# EAGLE board indicator_pcb (EAGLE 9.6.2)
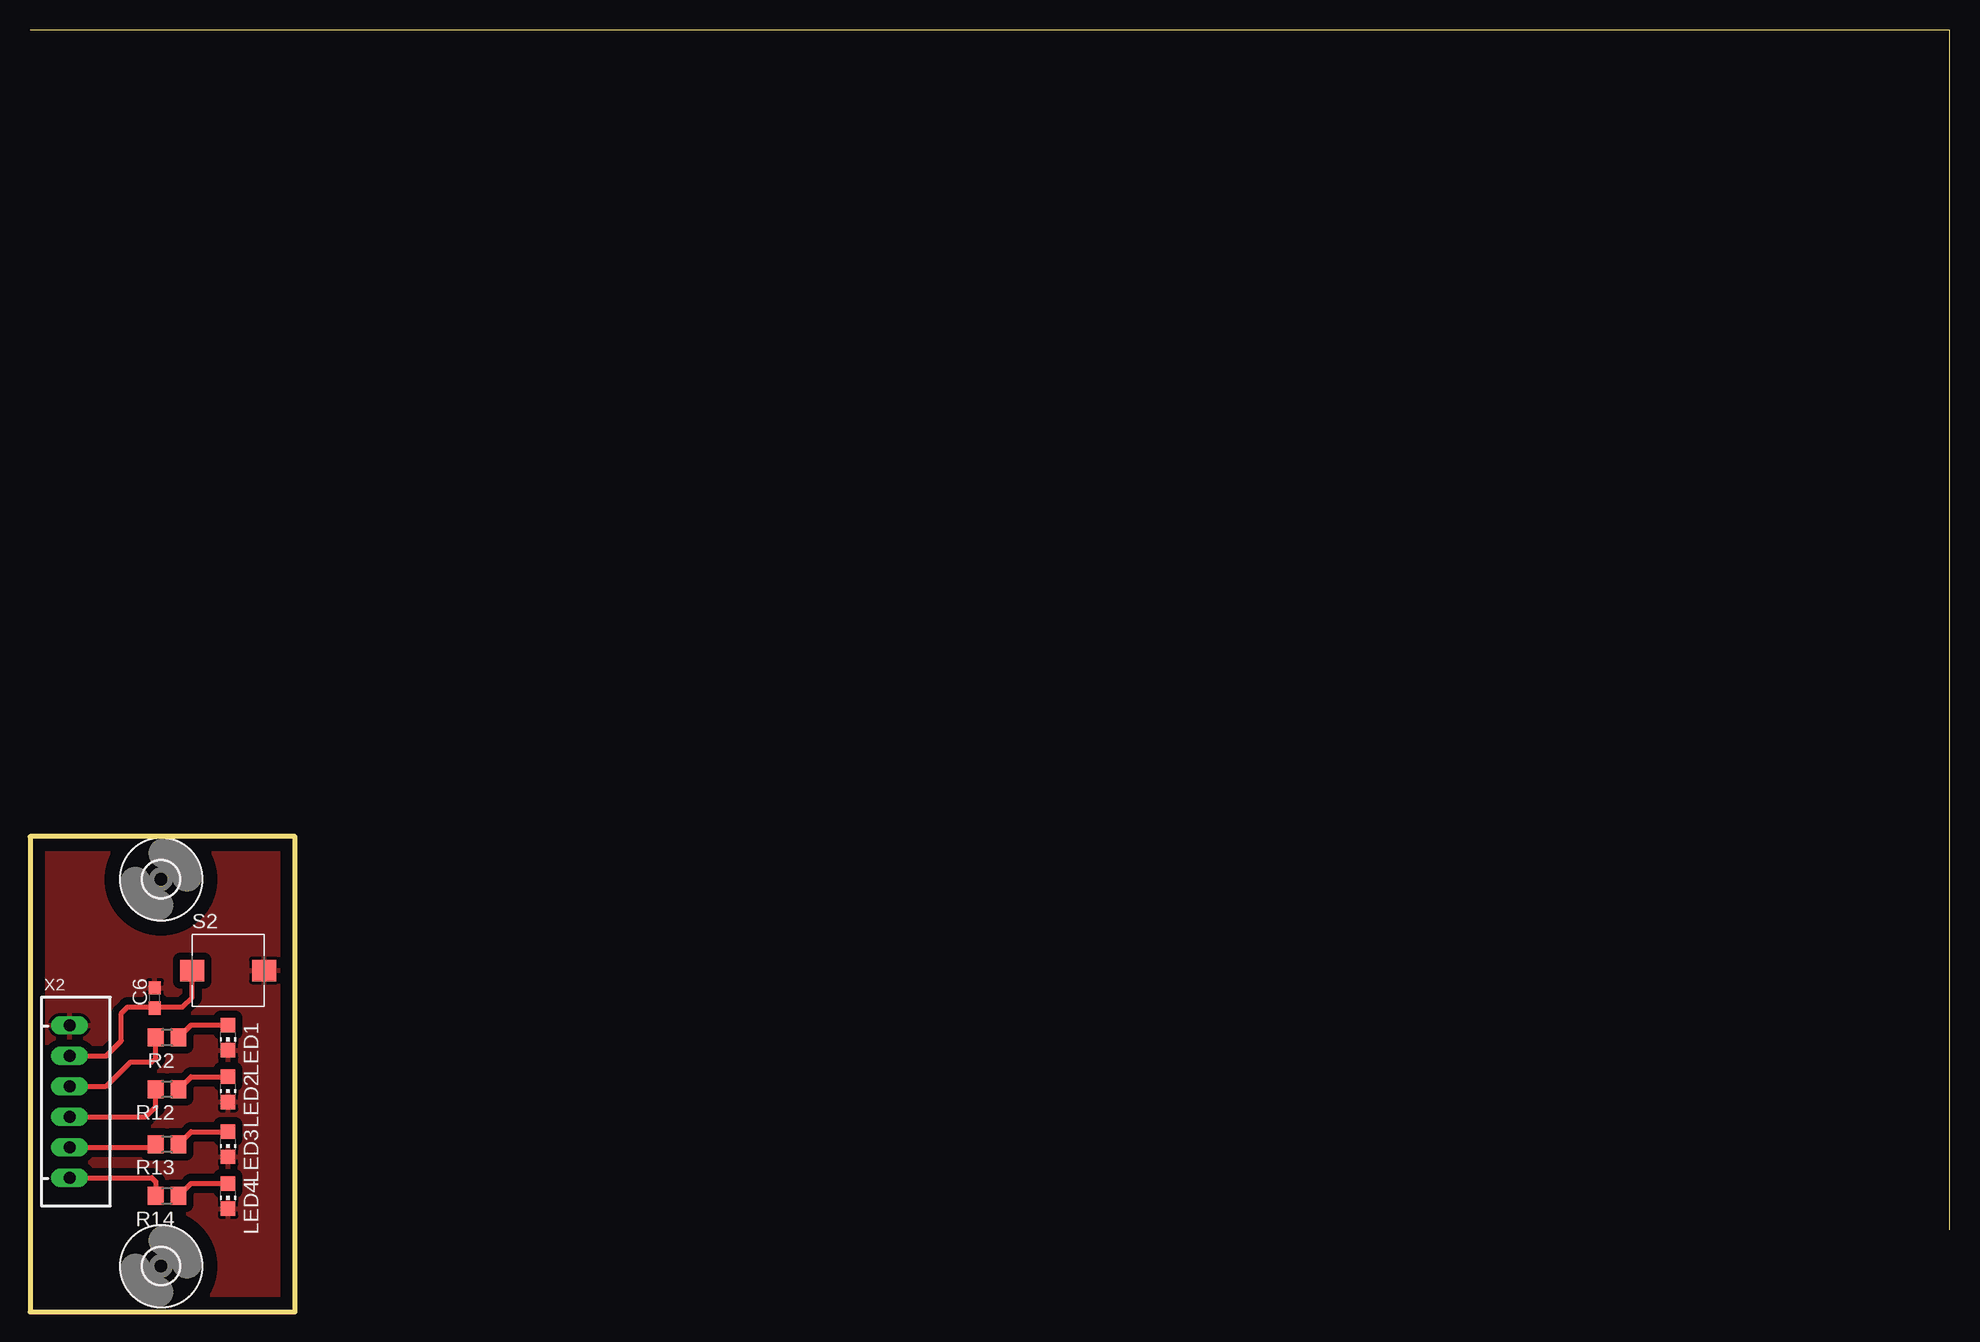
[diagram p0: board, top side]

Size 160 x 106.86 mm. Coordinates in mm from the lower left corner, seen from the top.
Outline: 160,6.86 160,106.86 0,106.86
Outline: 0,0 22.1,0 22.1,39.62 0,39.62 0,0
Copper layers (1*16): Top 0.035mm / dielectric 1.5mm / Bottom 0.035mm
Design rules "default": minimum track width 6mil, minimum drill 0.35mm, track to track 6mil, track to pad 6mil, pad to pad 6mil, via to via 6mil, smd to smd 6mil, copper to edge 40mil, drill to drill 6mil, minimum pad ring 10mil, minimum via ring 8mil, stop-mask expansion 4mil, vias tented up to drill 0mil, thermal gap 10mil

## Footprints (pad centres in the part's own frame; a part is rotated, then mirrored left to right if it is on the bottom)
C0603 = smd 1.1 x 1: 1 -0.85,0; 2 0.85,0
CHIP-LED0805 = smd 1.2 x 1.2: A 0,-1.05; C 0,1.05
R0805 = smd 1.3 x 1.5: 1 -0.95,0; 2 0.95,0
SW_TL9210AF180Q = smd 2 x 1.8: 1 -3,0; 2 3,0
3,0 = hole 3: 0,0
JST-XH-06-PACKAGE-LONG-PAD = drill 1.016 long: 1 -6.35,0; 2 -3.81,0; 3 -1.27,0; 4 1.27,0; 5 3.81,0; 6 6.35,0

## Placement (x,y rotation side)
C6  [C0603]  10.41,26.16 90 top
LED1  [CHIP-LED0805]  16.51,22.86 180 top
LED2  [CHIP-LED0805]  16.51,18.54 180 top
LED3  [CHIP-LED0805]  16.51,13.97 180 top
LED4  [CHIP-LED0805]  16.51,9.65 180 top
R2  [R0805]  11.43,22.86 180 top
R12  [R0805]  11.43,18.54 180 top
R13  [R0805]  11.43,13.97 180 top
R14  [R0805]  11.43,9.65 180 top
S2  TL9210AF180Q  [SW_TL9210AF180Q]  16.51,28.45 0 top
U$1  [3,0]  10.92,36.07 0 top
U$2  [3,0]  10.92,3.81 0 top
X2  PCB_SEC  [JST-XH-06-PACKAGE-LONG-PAD]  3.3,17.53 270 top

## Library data of the parts
C6 = rcl; SPICEPREFIX: C
LED1-LED4 = led
R2 R12-R14 = rcl; SPICEPREFIX: R
S2 = TL9210AF180Q; AVAILABILITY: In Stock; DESCRIPTION: Tactile Switch SPST-NO Top Actuated Surface Mount; MF: E-Switch; MP: TL9210AF180Q; PACKAGE: None; PRICE: None
U$1 U$2 = holes
X2 = Rembrandt Electronics - JST XH Connectors v1-0-2-2-2-2

## Nets
BUTTON: C6.1 S2.1 X2.2
GND: C6.2 LED1.C LED2.C LED3.C LED4.C S2.2 X2.1
LEDIN1: R2.2 X2.3
LEDIN2: R12.2 X2.4
LEDIN3: R13.2 X2.5
LEDIN4: R14.2 X2.6
N$1: LED1.A R2.1
N$2: LED2.A R12.1
N$3: LED3.A R13.1
N$4: LED4.A R14.1

## Tracks (layer width: path | path; a pad name or v marks a point on that pad's centre or on a via)
BUTTON
  Top 0.406: C6.1 10.5,25.4 | 10.5,25.4 12.7,25.4 13.51,26.21 S2.1 | 10.5,25.4 8.13,25.4 7.62,24.89 7.62,22.61 6.35,21.34 X2.2
GND
  pour Top (isolate 0.61): 0,39.62 0,0 22.1,0 22.1,39.62
LEDIN1
  Top 0.406: X2.3 6.35,18.8 8.38,20.83 10.16,20.83 10.48,21.15 R2.2
LEDIN2
  Top 0.406: X2.4 9.65,16.26 10.48,17.08 R12.2
LEDIN3
  Top 0.406: X2.5 10.23,13.72 R13.2
LEDIN4
  Top 0.406: X2.6 10.16,11.18 10.48,10.86 R14.2
N$1
  Top 0.406: R2.1 13.43,23.91 LED1.A
N$2
  Top 0.406: R12.1 13.43,19.59 LED2.A
N$3
  Top 0.406: R13.1 13.43,15.02 LED3.A
N$4
  Top 0.406: R14.1 13.43,10.7 LED4.A